# EAGLE board USBHubAndSensorsNEWVIAS (EAGLE 6.0), part 1 of 2
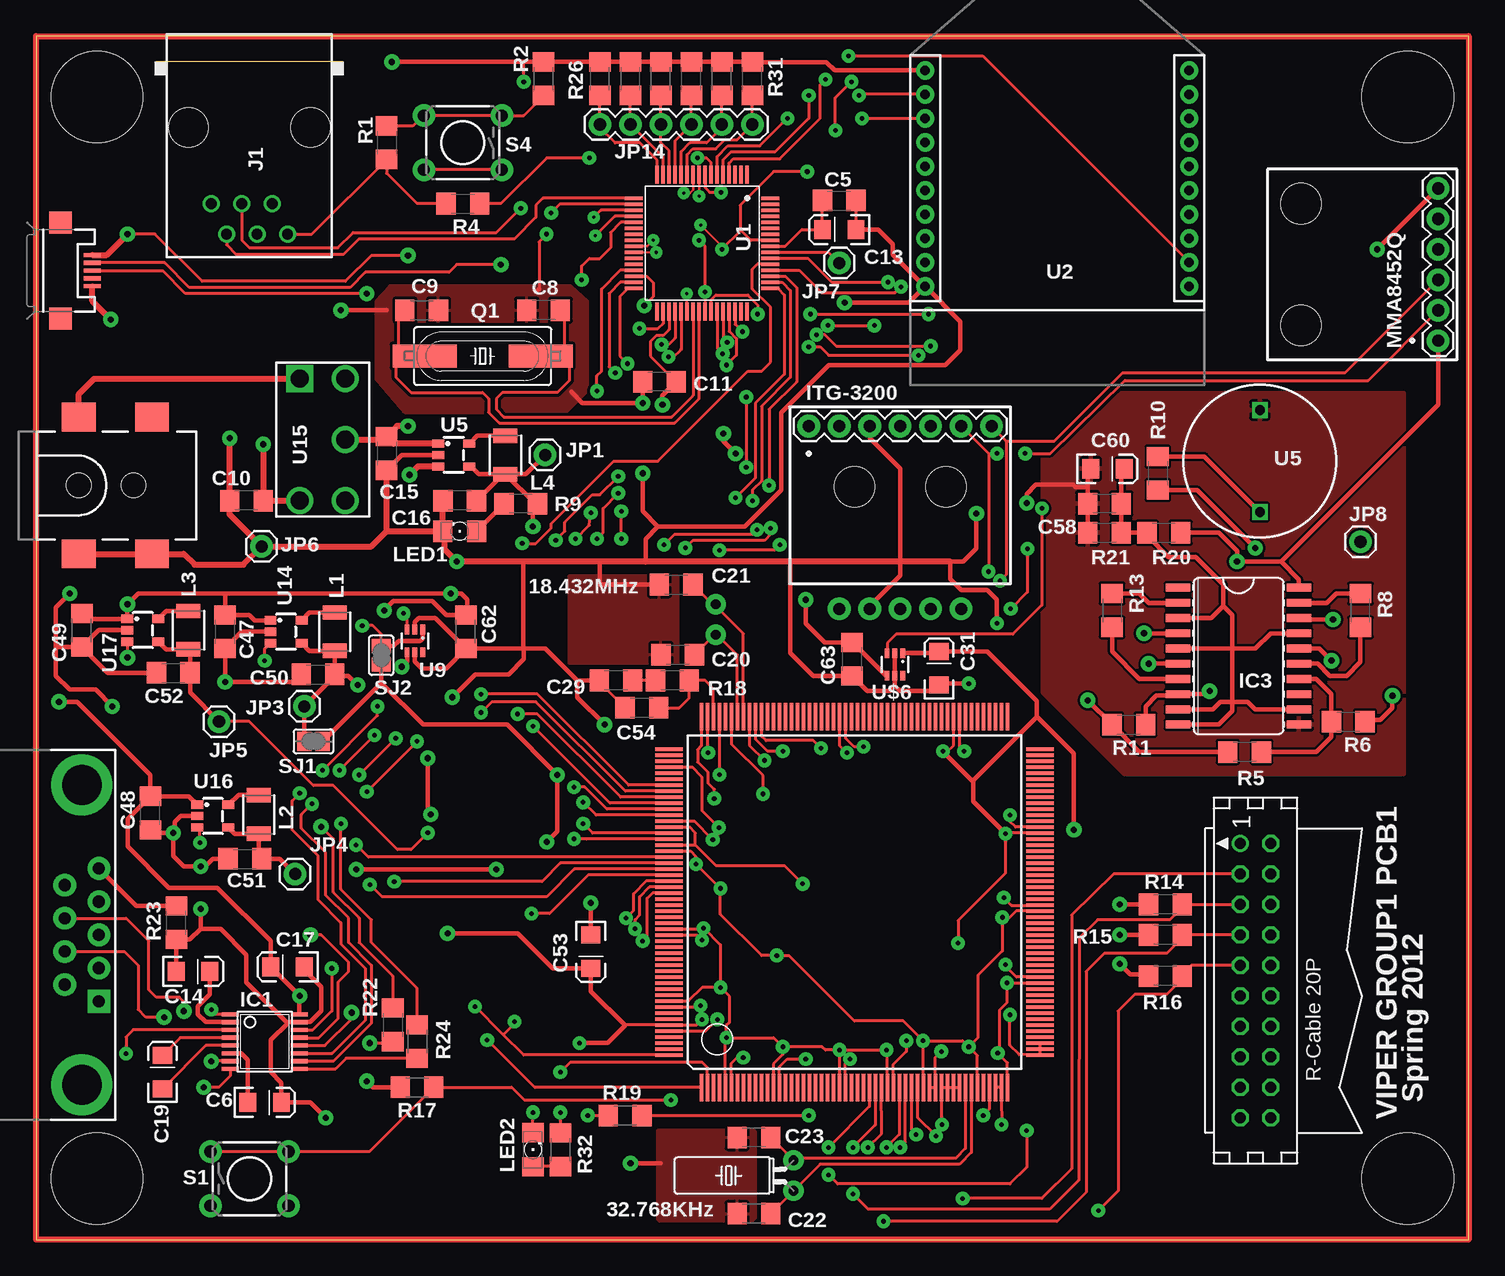
[diagram p0: board, top side]
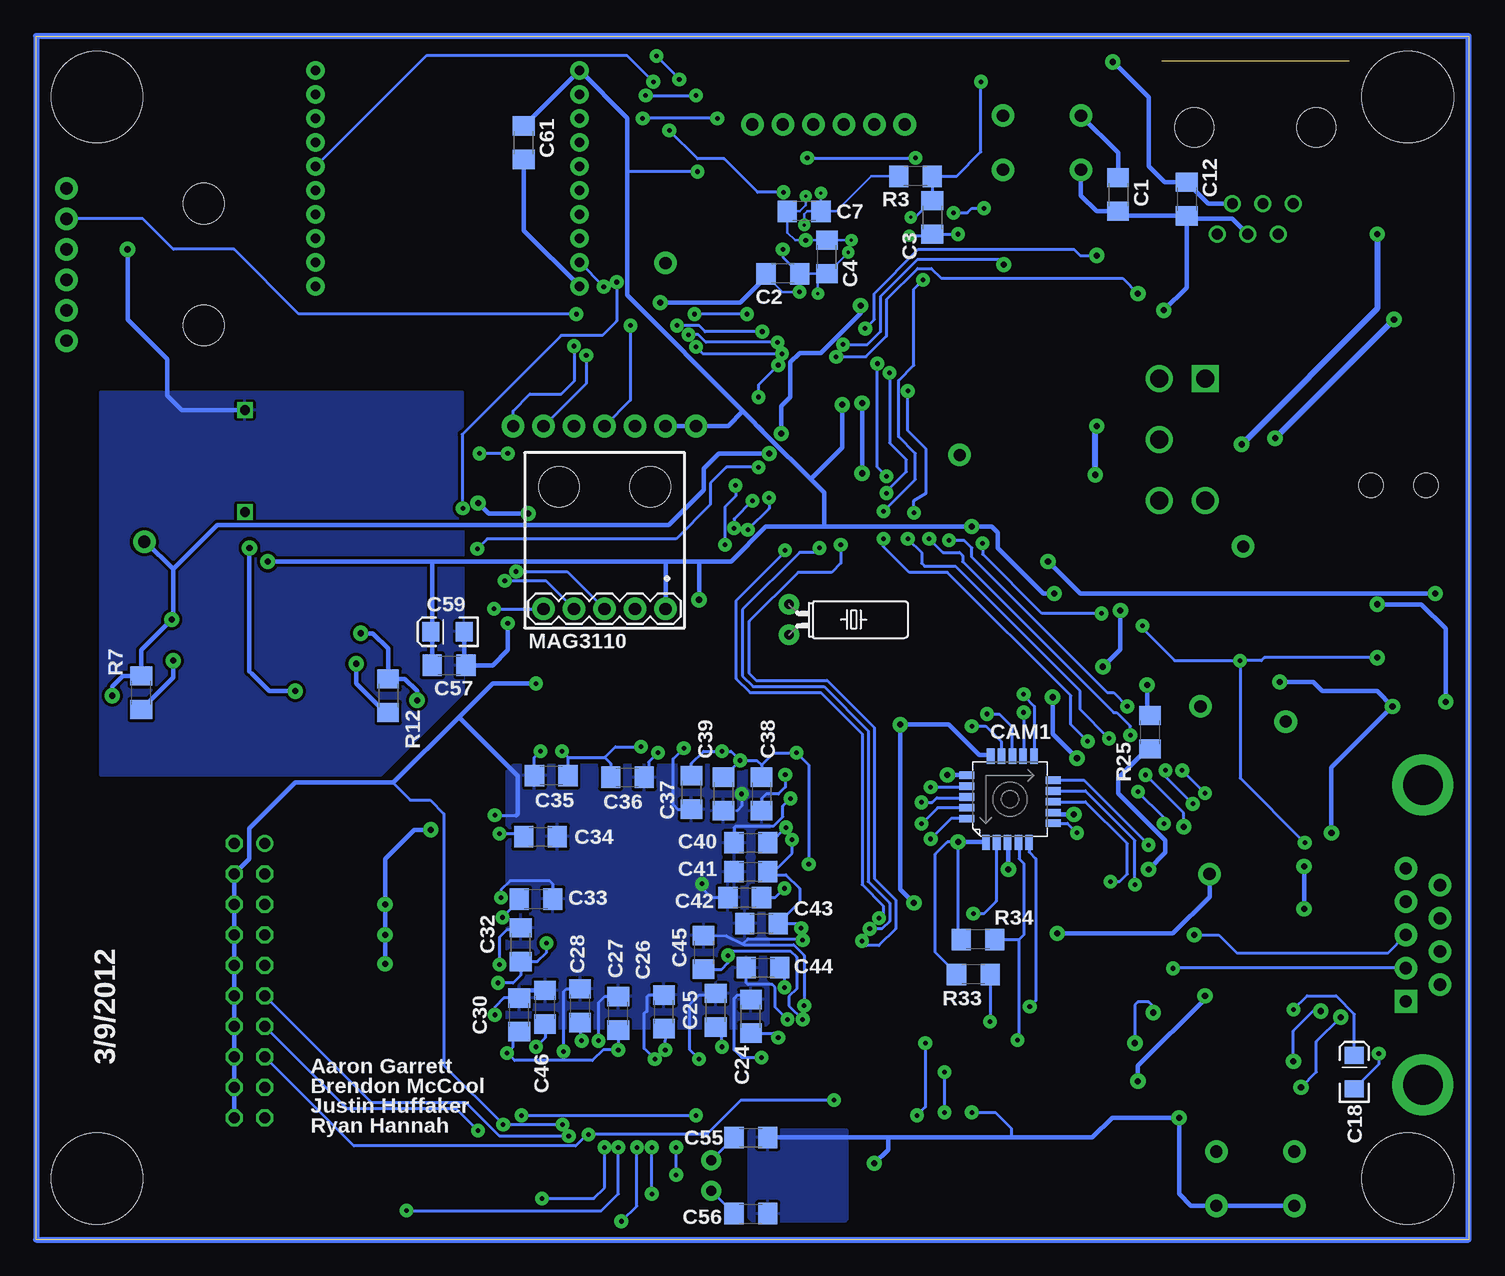
[diagram p1: board, bottom side, seen from below]

Size 119.38 x 100.33 mm. Coordinates in mm from the lower left corner, seen from the top.
Outline: 0,0 119.38,0 119.38,100.33 0,100.33 0,0
Copper layers (1*16): Top 0.035mm / dielectric 1.5mm / Bottom 0.035mm
Design rules: minimum track width 8mil, minimum drill 10mil, track to track 8mil, track to pad 8mil, pad to pad 6mil, via to via 8mil, smd to smd 8mil, copper to edge 40mil, drill to drill 15mil, minimum pad ring 10mil, minimum via ring 15mil, stop-mask expansion 4mil, vias tented up to drill 0mil, thermal gap 10mil
Holes 7.62 mm at 5.08,95.25 5.08,5.08 114.3,95.25 114.3,5.08
Holes 3.37 mm at 105.41,86.36 105.41,76.2 68.2,62.74 75.82,62.74

## Footprints (pad centres in the part's own frame; a part is rotated, then mirrored left to right if it is on the bottom)
TC38H = drill 0.813 pad 1.676: 1 -1.27,0; 2 1.27,0
1206 = smd 1.6 x 1.8: 1 -1.4,0; 2 1.4,0
EIA3216 = smd 1.4 x 1.6: A 1.4,0; C -1.4,0
TCM8230MD = smd 0.635 x 1.27: 1 2,3.6; 2 1.1,3.6; 3 0.2,3.6; 4 -0.7,3.6; 5 -1.6,3.6; 11 -2,-3.6; 12 -1.1,-3.6; 13 -0.2,-3.6; 14 0.7,-3.6; 15 1.6,-3.6 | smd 1.27 x 0.635: 6 -3.6,2; 7 -3.6,1.1; 8 -3.6,0.2; 9 -3.6,-0.7; 10 -3.6,-1.6; 16 3.6,-2; 17 3.6,-1.1; 18 3.6,-0.2; 19 3.6,0.7; 20 3.6,1.6
CON20 = drill 0.914: 1 -11.43,-1.27 | drill 0.914 octagon: 2 -11.43,1.27; 3 -8.89,-1.27; 4 -8.89,1.27; 5 -6.35,-1.27; 6 -6.35,1.27; 7 -3.81,-1.27; 8 -3.81,1.27; 9 -1.27,-1.27; 10 -1.27,1.27; 11 1.27,-1.27; 12 1.27,1.27; 13 3.81,-1.27; 14 3.81,1.27; 15 6.35,-1.27; 16 6.35,1.27; 17 8.89,-1.27; 18 8.89,1.27; 19 11.43,-1.27; 20 11.43,1.27
TSSOP16 = smd 0.35 x 1.4: 1 -2.275,-2.875; 2 -1.625,-2.875; 3 -0.975,-2.875; 4 -0.325,-2.875; 5 0.325,-2.875; 6 0.975,-2.875; 7 1.625,-2.875; 8 2.275,-2.875; 9 2.275,2.875; 10 1.625,2.875; 11 0.975,2.875; 12 0.325,2.875; 13 -0.325,2.875; 14 -0.975,2.875; 15 -1.625,2.875; 16 -2.275,2.875
SO20L = smd 0.66 x 2.032: 1 -5.715,-5.029; 2 -4.445,-5.029; 3 -3.175,-5.029; 4 -1.905,-5.029; 5 -0.635,-5.029; 6 0.635,-5.029; 7 1.905,-5.029; 8 3.175,-5.029; 9 4.445,-5.029; 10 5.715,-5.029; 11 5.715,5.029; 12 4.445,5.029; 13 3.175,5.029; 14 1.905,5.029; 15 0.635,5.029; 16 -0.635,5.029; 17 -1.905,5.029; 18 -3.175,5.029; 19 -4.445,5.029; 20 -5.715,5.029
RJ11-NO_SHIELD = drill 0.9 pad 1.4: 1 -3.175,8.89; 2 -1.905,6.35; 3 -0.635,8.89; 4 0.635,6.35; 5 1.905,8.89; 6 3.175,6.35 | hole 3.251: -5.08,0; 5.08,0
POWER_JACK_SMD = smd 2.8 x 2.4: GND 0,-5.7; P$4 6.1,-5.7; VIN0 0,5.7; VIN1 6.1,5.7 | hole 2.032: 0,0; 4.572,0
1X01 = drill 1.016 pad 1.88: 1 0,0
1X07 = drill 1.016 pad 1.88: 1 0,0; 2 2.54,0; 3 5.08,0; 4 7.62,0; 5 10.16,0; 6 12.7,0; 7 15.24,0
1X06 = drill 1.016 pad 1.88: 1 0,0; 2 2.54,0; 3 5.08,0; 4 7.62,0; 5 10.16,0; 6 12.7,0
1X05 = drill 1.016 pad 1.88: 1 0,0; 2 2.54,0; 3 5.08,0; 4 7.62,0; 5 10.16,0
1210 = smd 1.2 x 2: 1 -1.6,0; 2 1.6,0
FKIT-LED-1206 = smd 1.6 x 1.803: A -1.422,0; C 1.422,0
HC49UP = smd 5.334 x 1.93: 1 -4.826,0; 2 4.826,0
TACTILE-PTH = drill 1.016 pad 1.88: 1 -3.251,2.261; 2 3.251,2.261; 3 -3.251,-2.261; 4 3.251,-2.261
SJ = smd 1.168 x 1.6: 1 -0.762,0; 2 0.762,0
64-TQFP = smd 1.5 x 0.3: P$1 -5.7,3.75; P$2 -5.7,3.25; P$3 -5.7,2.75; P$4 -5.7,2.25; P$5 -5.7,1.75; P$6 -5.7,1.25; P$7 -5.7,0.75; P$8 -5.7,0.25; P$9 -5.7,-0.25; P$10 -5.7,-0.75; P$11 -5.7,-1.25; P$12 -5.7,-1.75; P$13 -5.7,-2.25; P$14 -5.7,-2.75; P$15 -5.7,-3.25; P$16 -5.7,-3.75; P$33 5.7,-3.75; P$34 5.7,-3.25; P$35 5.7,-2.75; P$36 5.7,-2.25; P$37 5.7,-1.75; P$38 5.7,-1.25; P$39 5.7,-0.75; P$40 5.7,-0.25; P$41 5.7,0.25; P$42 5.7,0.75; P$43 5.7,1.25; P$44 5.7,1.75; P$45 5.7,2.25; P$46 5.7,2.75; P$47 5.7,3.25; P$48 5.7,3.75 | smd 0.3 x 1.5: P$17 -3.75,-5.7; P$18 -3.25,-5.7; P$19 -2.75,-5.7; P$20 -2.25,-5.7; P$21 -1.75,-5.7; P$22 -1.25,-5.7; P$23 -0.75,-5.7; P$24 -0.25,-5.7; P$25 0.25,-5.7; P$26 0.75,-5.7; P$27 1.25,-5.7; P$28 1.75,-5.7; P$29 2.25,-5.7; P$30 2.75,-5.7; P$31 3.25,-5.7; P$32 3.75,-5.7; P$49 3.75,5.7; P$50 3.25,5.7; P$51 2.75,5.7; P$52 2.25,5.7; P$53 1.75,5.7; P$54 1.25,5.7; P$55 0.75,5.7; P$56 0.25,5.7; P$57 -0.25,5.7; P$58 -0.75,5.7; P$59 -1.25,5.7; P$60 -1.75,5.7; P$61 -2.25,5.7; P$62 -2.75,5.7; P$63 -3.25,5.7; P$64 -3.75,5.7
XBEE-SILK = drill 0.8 pad 1.524: 1 -11,20; 2 -11,18; 3 -11,16; 4 -11,14; 5 -11,12; 6 -11,10; 7 -11,8; 8 -11,6; 9 -11,4; 10 -11,2; 11 11,2; 12 11,4; 13 11,6; 14 11,8; 15 11,10; 16 11,12; 17 11,14; 18 11,16; 19 11,18; 20 11,20
40TR = drill 0.8 square: P$1 0,4.25; P$2 0,-4.25
SOT23-5 = smd 0.686 x 0.991: P$1 -0.953,-1.295; P$2 0,-1.295; P$3 0.953,-1.295; P$4 0.953,1.295; P$5 -0.953,1.295
SC-70-6 = smd 0.4 x 0.8: P$1 -0.65,-0.95; P$2 0,-0.95; P$3 0.65,-0.95; P$4 0.65,0.95; P$5 0,0.95; P$6 -0.65,0.95
PQFP208 = smd 0.3 x 2.286: 1 -12.75,-15.458; 2 -12.25,-15.458; 3 -11.75,-15.458; 4 -11.25,-15.458; 5 -10.75,-15.458; 6 -10.25,-15.458; 7 -9.75,-15.458; 8 -9.25,-15.458; 9 -8.75,-15.458; 10 -8.25,-15.458; 11 -7.75,-15.458; 12 -7.25,-15.458; 13 -6.75,-15.458; 14 -6.25,-15.458; 15 -5.75,-15.458; 16 -5.25,-15.458; 17 -4.75,-15.458; 18 -4.25,-15.458; 19 -3.75,-15.458; 20 -3.25,-15.458; 21 -2.75,-15.458; 22 -2.25,-15.458; 23 -1.75,-15.458; 24 -1.25,-15.458; 25 -0.75,-15.458; 26 -0.25,-15.458; 27 0.25,-15.458; 28 0.75,-15.458; 29 1.25,-15.458; 30 1.75,-15.458; 31 2.25,-15.458; 32 2.75,-15.458; 33 3.25,-15.458; 34 3.75,-15.458; 35 4.25,-15.458; 36 4.75,-15.458; 37 5.25,-15.458; 38 5.75,-15.458; 39 6.25,-15.458; 40 6.75,-15.458; 41 7.25,-15.458; 42 7.75,-15.458; 43 8.25,-15.458; 44 8.75,-15.458; 45 9.25,-15.458; 46 9.75,-15.458; 47 10.25,-15.458; 48 10.75,-15.458; 49 11.25,-15.458; 50 11.75,-15.458; 51 12.25,-15.458; 52 12.75,-15.458; 105 12.75,15.458; 106 12.25,15.458; 107 11.75,15.458; 108 11.25,15.458; 109 10.75,15.458; 110 10.25,15.458; 111 9.75,15.458; 112 9.25,15.458; 113 8.75,15.458; 114 8.25,15.458; 115 7.75,15.458; 116 7.25,15.458; 117 6.75,15.458; 118 6.25,15.458; 119 5.75,15.458; 120 5.25,15.458; 121 4.75,15.458; 122 4.25,15.458; 123 3.75,15.458; 124 3.25,15.458; 125 2.75,15.458; 126 2.25,15.458; 127 1.75,15.458; 128 1.25,15.458; 129 0.75,15.458; 130 0.25,15.458; 131 -0.25,15.458; 132 -0.75,15.458; 133 -1.25,15.458; 134 -1.75,15.458; 135 -2.25,15.458; 136 -2.75,15.458; 137 -3.25,15.458; 138 -3.75,15.458; 139 -4.25,15.458; 140 -4.75,15.458; 141 -5.25,15.458; 142 -5.75,15.458; 143 -6.25,15.458; 144 -6.75,15.458; 145 -7.25,15.458; 146 -7.75,15.458; 147 -8.25,15.458; 148 -8.75,15.458; 149 -9.25,15.458; 150 -9.75,15.458; 151 -10.25,15.458; 152 -10.75,15.458; 153 -11.25,15.458; 154 -11.75,15.458; 155 -12.25,15.458; 156 -12.75,15.458 | smd 2.286 x 0.3: 53 15.458,-12.75; 54 15.458,-12.25; 55 15.458,-11.75; 56 15.458,-11.25; 57 15.458,-10.75; 58 15.458,-10.25; 59 15.458,-9.75; 60 15.458,-9.25; 61 15.458,-8.75; 62 15.458,-8.25; 63 15.458,-7.75; 64 15.458,-7.25; 65 15.458,-6.75; 66 15.458,-6.25; 67 15.458,-5.75; 68 15.458,-5.25; 69 15.458,-4.75; 70 15.458,-4.25; 71 15.458,-3.75; 72 15.458,-3.25; 73 15.458,-2.75; 74 15.458,-2.25; 75 15.458,-1.75; 76 15.458,-1.25; 77 15.458,-0.75; 78 15.458,-0.25; 79 15.458,0.25; 80 15.458,0.75; 81 15.458,1.25; 82 15.458,1.75; 83 15.458,2.25; 84 15.458,2.75; 85 15.458,3.25; 86 15.458,3.75; 87 15.458,4.25; 88 15.458,4.75; 89 15.458,5.25; 90 15.458,5.75; 91 15.458,6.25; 92 15.458,6.75; 93 15.458,7.25; 94 15.458,7.75; 95 15.458,8.25; 96 15.458,8.75; 97 15.458,9.25; 98 15.458,9.75; 99 15.458,10.25; 100 15.458,10.75; 101 15.458,11.25; 102 15.458,11.75; 103 15.458,12.25; 104 15.458,12.75; 157 -15.458,12.75; 158 -15.458,12.25; 159 -15.458,11.75; 160 -15.458,11.25; 161 -15.458,10.75; 162 -15.458,10.25; 163 -15.458,9.75; 164 -15.458,9.25; 165 -15.458,8.75; 166 -15.458,8.25; 167 -15.458,7.75; 168 -15.458,7.25; 169 -15.458,6.75; 170 -15.458,6.25; 171 -15.458,5.75; 172 -15.458,5.25; 173 -15.458,4.75; 174 -15.458,4.25; 175 -15.458,3.75; 176 -15.458,3.25; 177 -15.458,2.75; 178 -15.458,2.25; 179 -15.458,1.75; 180 -15.458,1.25; 181 -15.458,0.75; 182 -15.458,0.25; 183 -15.458,-0.25; 184 -15.458,-0.75; 185 -15.458,-1.25; 186 -15.458,-1.75; 187 -15.458,-2.25; 188 -15.458,-2.75; 189 -15.458,-3.25; 190 -15.458,-3.75; 191 -15.458,-4.25; 192 -15.458,-4.75; 193 -15.458,-5.25; 194 -15.458,-5.75; 195 -15.458,-6.25; 196 -15.458,-6.75; 197 -15.458,-7.25; 198 -15.458,-7.75; 199 -15.458,-8.25; 200 -15.458,-8.75; 201 -15.458,-9.25; 202 -15.458,-9.75; 203 -15.458,-10.25; 204 -15.458,-10.75; 205 -15.458,-11.25; 206 -15.458,-11.75; 207 -15.458,-12.25; 208 -15.458,-12.75
G-197 = drill 1.5 square: P$1 -5.08,-1.905 | drill 1.5: P$2 5.08,-1.905; P$3 5.08,1.905; P$4 -5.08,1.905; P$5 0,1.905
DB9 = drill 1.016 pad 1.88 square: 1 -5.54,-1.42 | drill 1.016 pad 1.88: 2 -2.77,-1.42; 3 0,-1.42; 4 2.77,-1.42; 5 5.54,-1.42; 6 -4.15,1.42; 7 -1.38,1.42; 8 1.38,1.42; 9 4.15,1.42 | drill 3.302 pad 5.08: G1 -12.5,0; G2 12.5,0
USB-MICROB = smd 0.35 x 1.4: D+ 0,2.65; D- -0.65,2.65; GND 1.3,2.65; ID 0.65,2.65; VBUS -1.3,2.65 | smd 1.8 x 1.9: MT1 -4,0; MT2 4,0

## Placement (x,y rotation side)
300-8444-ND  18.432MHz  [TC38H]  56.64,51.69 270 bottom
535-9034-ND  32.768kHz  [TC38H]  63.12,5.33 90 top
C1  0.1uf  [1206]  29.21,87.12 270 bottom
C2  0.1uf  [1206]  57.15,80.52 180 bottom
C3  0.1uf  [1206]  44.7,85.22 270 bottom
C4  0.1uf  [1206]  53.47,81.92 90 bottom
C5  0.1uf  [1206]  66.93,86.61 0 top
C6  0.1uf  [EIA3216]  19.05,11.43 0 top
C7  0.1uf  [1206]  55.37,85.72 180 bottom
C8  22pf  [1206]  42.29,77.47 180 top
C9  22pf  [1206]  32.13,77.47 0 top
C10  1uf  [1206]  17.53,61.59 180 top
C11  0.1uf  [1206]  51.94,71.5 180 top
C12  0.1uf  [1206]  23.5,86.74 270 bottom
C13  10uf  [EIA3216]  66.93,84.2 180 top
C14  0.1uf  [EIA3216]  13.08,22.35 0 top
C15  4.7uF  [1206]  29.21,65.53 270 top
C16  10uf  [1206]  35.31,61.59 180 top
C17  0.1uf  [EIA3216]  20.95,22.73 180 top
C18  0.1uf  [EIA3216]  9.53,13.97 90 bottom
C19  0.1uf  [EIA3216]  10.54,13.97 90 top
C20  10pF  [1206]  53.47,48.77 0 top
C21  10pF  [1206]  53.34,54.61 0 top
C22  10pF  [1206]  59.82,2.16 180 top
C23  10pF  [1206]  59.82,8.51 180 top
C24  100nF  [1206]  59.82,18.61 90 bottom
C25  100nF  [1206]  62.74,19.11 90 bottom
C26  100nF  [1206]  67.06,18.99 90 bottom
C27  100nF  [1206]  70.87,18.86 90 bottom
C28  100nF  [1206]  74.04,19.49 90 bottom
C29  10nf  [1206]  48.32,46.61 180 top
C30  100nF  [1206]  79.12,18.73 90 bottom
C31  10uf  [EIA3216]  75.25,47.62 90 top
C32  100nF  [1206]  78.99,24.57 90 bottom
C33  100nF  [1206]  77.72,28.38 0 bottom
C34  100nF  [1206]  77.34,33.59 0 bottom
C35  100nF  [1206]  76.45,38.67 180 bottom
C36  100nF  [1206]  70.1,38.54 0 bottom
C37  100nF  [1206]  64.77,37.27 270 bottom
C38  100nF  [1206]  58.93,37.15 270 bottom
C39  100nF  [1206]  62.1,37.15 270 bottom
C40  100nF  [1206]  59.82,33.08 0 bottom
C41  100nF  [1206]  59.82,30.67 0 bottom
C42  100nF  [1206]  60.33,28.51 0 bottom
C43  100nF  [1206]  58.93,26.35 0 bottom
C44  100nF  [1206]  58.8,22.67 0 bottom
C45  100nF  [1206]  63.75,23.94 270 bottom
C46  100nF  [1206]  76.96,19.37 90 bottom
C47  4.7uF  [1206]  15.75,50.67 90 top
C48  4.7uF  [1206]  9.53,35.56 90 top
C49  4.7uF  [1206]  3.81,50.8 90 top
C50  10uF  [1206]  23.5,47.12 0 top
C51  10uf  [1206]  17.4,31.75 0 top
C52  10uf  [1206]  11.43,47.24 0 top
C53  10uf  [EIA3216]  46.23,24 270 top
C54  1nf  [1206]  50.48,44.32 180 top
C55  7pF  [1206]  59.82,8.51 0 bottom
C56  7pF  [1206]  59.82,2.16 0 bottom
C57  0.1uf  [1206]  84.96,47.88 0 bottom
C58  0.1uf  [1206]  89.03,61.34 180 top
C59  4.7uf  [EIA3216]  85.09,50.67 180 bottom
C60  4.7uf  [EIA3216]  89.28,64.26 0 top
C61  0.1uf  [1206]  78.74,91.44 90 bottom
C62  0.1uf  [1206]  35.81,50.67 90 top
C63  0.1uf  [1206]  68.01,48.39 90 top
CAM1  TCM8230MD  [TCM8230MD]  38.23,36.7 180 bottom
CON1  [CON20]  101.6,21.59 270 top
IC1  MAX3232CUE  [TSSOP16]  19.05,16.51 270 top
IC3  MAX275ACPBCWP  [SO20L]  100.2,48.64 270 top
J1  RJ11-6L-B  [RJ11-NO_SHIELD]  17.78,92.71 180 top
J2  POWER_JACKSMD  [POWER_JACK_SMD]  3.56,62.87 0 top
JP1  M01PTH  [1X01]  42.42,65.41 0 top
JP3  M01PTH  [1X01]  22.35,44.45 0 top
JP4  M01PTH  [1X01]  21.59,30.48 0 top
JP4_ITG-3200  [1X07]  64.39,67.82 0 top
JP5  M01PTH  [1X01]  15.24,43.18 0 top
JP5_MMA8452Q  [1X06]  116.84,74.93 90 top
JP6  M01PTH  [1X01]  18.8,57.78 0 top
JP6_MAG3110  [1X05]  66.93,52.58 180 bottom
JP7  M01PTH  [1X01]  66.93,81.41 180 top
JP8  M01PTH  [1X01]  110.36,58.17 0 top
JP14  [1X06]  46.99,92.96 0 top
L1  2.2uH  [1210]  24.89,50.67 270 top
L2  2.2uH  [1210]  18.54,35.43 270 top
L3  2.2uH  [1210]  12.7,50.8 270 top
L4  2.2uH  [1210]  39.12,65.41 270 top
LED1  [FKIT-LED-1206]  35.31,59.05 180 top
LED2  [FKIT-LED-1206]  41.4,7.49 90 top
Q1  8MHz  [HC49UP]  37.21,73.66 0 top
R1  370  [1206]  29.21,91.44 270 top
R2  10k  [1206]  42.29,96.77 90 top
R3  10  [1206]  46.1,88.65 180 bottom
R4  100  [1206]  35.56,86.36 0 top
R5  50k  [1206]  100.71,40.64 180 top
R6  100k  [1206]  109.35,43.18 0 top
R7  45k  [1206]  110.62,45.59 90 bottom
R8  50k  [1206]  110.36,52.45 90 top
R9  65  [1206]  40.39,61.34 180 top
R10  50k  [1206]  93.47,63.88 270 top
R11  100k  [1206]  91.06,42.93 0 top
R12  45k  [1206]  90.04,45.34 270 bottom
R13  50k  [1206]  89.66,52.45 270 top
R14  100K  [1206]  94.11,27.94 180 top
R15  100K  [1206]  94.11,25.4 180 top
R16  100K  [1206]  94.11,21.97 180 top
R17  1K  [1206]  31.75,12.7 0 top
R18  100K  [1206]  53.02,46.61 180 top
R19  100k  [1206]  49.09,10.35 0 top
R20  4.7k  [1206]  93.98,58.93 0 top
R21  4.7k  [1206]  89.03,58.93 0 top
R22  470  [1206]  29.72,17.91 270 top
R23  10  [1206]  11.68,26.42 90 top
R24  470  [1206]  31.75,16.51 270 top
R25  100K  [1206]  26.54,42.29 90 bottom
R26  10k  [1206]  46.99,96.77 90 top
R27  10k  [1206]  49.53,96.77 90 top
R28  10k  [1206]  52.07,96.77 90 top
R29  10k  [1206]  54.61,96.77 90 top
R30  10k  [1206]  57.15,96.77 90 top
R31  10k  [1206]  59.69,96.77 90 top
R32  1k  [1206]  43.69,7.49 270 top
R33  10k  [1206]  41.27,22.1 180 bottom
R34  10k  [1206]  40.89,25.02 180 bottom
S1  [TACTILE-PTH]  17.78,5.08 0 top
S4  [TACTILE-PTH]  35.56,91.44 180 top
SJ1  [SJ]  23.11,41.53 180 top
SJ2  [SJ]  28.77,48.7 90 top
U$1  PIC32MX534F06HTQFP  [64-TQFP]  55.5,83.06 270 top
U$2  XBEE-1B2  [XBEE-SILK]  85.09,77.47 0 top
U$5  40TR-12B  [40TR]  101.98,64.9 0 top
U$5_LM3671MF-3.3  LM36715  [SOT23-5]  34.8,65.41 270 top
U$6  MIC94061YC6  [SC-70-6]  71.56,47.94 180 top
U$7  AT91SAM9XE256  [PQFP208]  68.2,28.13 0 top
U$9  MIC94061YC6  [SC-70-6]  31.56,49.91 180 top
U$14_LM3671MF-2.8  LM36715  [SOT23-5]  20.83,50.67 270 top
U$15  G-107PLUG-IN  [G-197]  23.88,66.67 270 top
U$16_LM3671MF-1.8  LM36715  [SOT23-5]  14.73,35.31 270 top
U$17_LM3671-1.5  LM36715  [SOT23-5]  8.89,50.8 270 top
X1  [DB9]  3.81,25.4 90 top
X2  USB-MICROB  [USB-MICROB]  2.03,80.77 270 top

## Library data of the parts
300-8444-ND 535-9034-ND = SparkFun-FreqCtrl
C1-C63 L1-L4 R1-R34 = SparkFun-Passives
CAM1 U$7 = AT91SAM9XE256
CON1 = con-harting; OC_FARNELL: unknown; OC_NEWARK: unknown
IC1 = maxim; MF: MAXIM; MPN: MAX3232CUE+; OC_FARNELL: 1593350; OC_NEWARK: 68K4629
IC3 = maxim
J1 = con-tycoelectronics; MF: TYCO ELECTRONICS; MPN: RJ11-6L-B; OC_FARNELL: unknown; OC_NEWARK: 52K3613
J2 JP1 JP3 JP4 JP4_ITG-3200 JP5 JP5_MMA8452Q JP6 JP6_MAG3110 JP7 JP8 JP14 X1 X2 = SparkFun-Connectors
LED1 LED2 = SparkFun-LED
Q1 = crystal; OC_FARNELL: unknown; OC_NEWARK: unknown
S1 S4 = SparkFun-Electromechanical
SJ1 SJ2 = jumper
U$1 U$5 U$5_LM3671MF-3.3 U$6 U$9 U$14_LM3671MF-2.8 U$15 U$16_LM3671MF-1.8 U$17_LM3671-1.5 = hw1
U$2 = SparkFun-RF

## Nets
1.8V: C28.1 C33.1 C37.1 C38.1 C39.1 C42.2 C45.2 C46.1 C51.2 C53.A JP4.1 L2.2 R19.1 U$7.38 U$7.47 U$7.77 U$7.147 U$7.148 U$7.155 U$7.174 U$7.203 U$16_LM3671MF-1.8.P$4
2.8V: C50.2 JP3.1 L1.2 R25.2 SJ1.2 U$14_LM3671MF-2.8.P$4
3.3V: C2.1 C3.1 C4.1 C7.1 C11.1 C12.1 C16.1 C17.A C47.2 C48.2 C49.2 C57.1 C59.A C61.2 C62.2 C63.2 IC1.16 IC3.20 J1.2 JP1.1 JP4_ITG-3200.1 JP4_ITG-3200.2 JP5_MMA8452Q.1 JP6_MAG3110.1 L4.2 R2.2 R3.1 R3.2 R9.1 R17.1 R20.2 R26.2 R27.2 R28.2 R29.2 R30.2 R31.2 U$1.P$10 U$1.P$19 U$1.P$26 U$1.P$35 U$1.P$38 U$1.P$57 U$2.1 U$5_LM3671MF-3.3.P$4 U$6.P$4 U$9.P$4 U$14_LM3671MF-2.8.P$1 U$16_LM3671MF-1.8.P$1 U$17_LM3671-1.5.P$1
5V: C15.1 U$5_LM3671MF-3.3.P$1 U$5_LM3671MF-3.3.P$3 U$15.P$5
AN15: IC3.18 JP8.1 R6.2 R7.2 U$1.P$30
CAM3.3V: SJ2.2 U$9.P$1 U$14_LM3671MF-2.8.P$3 U$16_LM3671MF-1.8.P$3 U$17_LM3671-1.5.P$3
CTSDATA: IC1.7 X1.8
GND: C1.2 C2.2 C3.2 C4.2 C5.2 C6.A C7.2 C8.2 C9.2 C10.2 C11.2 C12.2 C13.C C14.C C15.2 C16.2 C17.C C20.1 C21.1 C22.2 C23.2 C24.2 C25.2 C26.2 C27.2 C28.2 C29.2 C30.2 C31.C C32.2 C33.2 C34.2 C35.2 C36.2 C37.2 C38.2 C39.2 C40.1 C41.1 C42.1 C43.1 C44.1 C45.1 C46.2 C47.1 C48.1 C49.1 C50.1 C51.1 C52.1 C53.C C54.2 C55.2 C56.2 C57.2 C58.2 C59.C C60.C C61.1 C62.1 C63.1 CAM1.7 CAM1.15 CON1.4 CON1.6 CON1.8 CON1.10 CON1.12 CON1.14 CON1.16 CON1.18 CON1.20 IC1.15 IC3.11 J1.3 J2.GND J2.P$4 JP4_ITG-3200.3 JP5_MMA8452Q.6 JP6.1 JP6_MAG3110.2 LED1.C LED2.C R21.1 R23.1 S1.3 S1.4 S4.1 S4.2 U$1.P$9 U$1.P$20 U$1.P$25 U$1.P$41 U$2.10 U$5.P$1 U$5_LM3671MF-3.3.P$2 U$6.P$2 U$6.P$5 U$7.6 U$7.14 U$7.25 U$7.33 U$7.39 U$7.40 U$7.41 U$7.42 U$7.43 U$7.44 U$7.50 U$7.51 U$7.53 U$7.54 U$7.55 U$7.66 U$7.78 U$7.91 U$7.113 U$7.133 U$7.146 U$7.151 U$7.153 U$7.156 U$7.170 U$7.173 U$7.188 U$7.200 U$7.204 U$9.P$2 U$9.P$5 U$14_LM3671MF-2.8.P$2 U$16_LM3671MF-1.8.P$2 U$17_LM3671-1.5.P$2 X2.GND
INT0: JP4_ITG-3200.4 U$1.P$46
INT1: JP5_MMA8452Q.5 U$1.P$42
INT4: JP6_MAG3110.5 U$1.P$45
N$1: C1.1 R1.1 R2.1 S4.3 S4.4
N$2: C24.1 C25.1 C26.1 C27.1 C30.1 C31.A C32.1 C34.1 C35.1 C36.1 C40.2 C41.2 C43.2 C44.2 R14.2 R15.2 R16.2 U$6.P$1 U$7.5 U$7.13 U$7.24 U$7.32 U$7.52 U$7.65 U$7.90 U$7.114 U$7.132 U$7.160 U$7.169 U$7.187 U$7.199
N$3: J1.4 U$1.P$18
N$4: C9.1 Q1.1 U$1.P$40
N$5: C8.1 Q1.2 U$1.P$39
N$6: R4.2 U$1.P$7
N$7: J1.5 U$1.P$17
N$8: L4.1 U$5_LM3671MF-3.3.P$5
N$9: U$1.P$6 U$2.3
N$10: C18.A IC1.1
N$11: C18.C IC1.3
N$12: C19.A IC1.4
N$13: C5.1 C13.A U$1.P$56
N$14: U$1.P$36 X2.D-
N$15: U$1.P$37 X2.D+
N$16: C19.C IC1.5
N$17: U$1.P$5 U$2.2
N$18: U$1.P$8 U$2.16
N$19: U$1.P$4 U$2.12
N$20: CON1.11 U$7.37
N$21: J1.1 R1.2 R4.1
N$22: CAM1.3 R25.1
N$23: C14.A IC1.2
N$24: C6.C IC1.6
N$25: IC3.14 R5.1 R6.1
N$26: R10.1 U$5.P$2
N$27: IC3.16 R7.1
N$28: LED1.A R9.2
N$29: IC3.15 R8.1
N$30: IC3.19 R8.2
N$31: IC3.2 R13.1
N$32: IC3.7 R13.2
N$33: IC3.6 R12.2
N$34: IC3.8 R10.2 R11.2
N$35: IC3.4 R5.2 R11.1 R12.1
N$36: CAM1.11 U$7.163
N$37: CAM1.12 U$7.164
N$38: CAM1.13 U$7.165
N$39: CAM1.14 U$7.166
N$40: CAM1.17 U$7.167
N$41: CAM1.18 U$7.168
N$42: CAM1.19 U$7.171
N$43: CAM1.20 U$7.172
N$44: CAM1.10 U$7.175
N$45: CAM1.8 U$7.176
N$46: CAM1.9 U$7.177
N$47: CAM1.2 U$7.178
N$48: CAM1.4 R34.1 U$7.1
N$49: CAM1.5 R33.1 U$7.208
N$50: 300-8444-ND.1 C21.2 U$7.149
N$51: 300-8444-ND.2 C20.2 U$7.150
N$52: 535-9034-ND.1 C22.1 C56.1 U$7.46
N$53: 535-9034-ND.2 C23.1 C55.1 U$7.45
N$54: CON1.5 R14.1 U$7.30
N$55: CON1.7 R15.1 U$7.31
N$56: CON1.9 R16.1 U$7.34
N$57: CON1.13 U$7.29
N$58: CON1.3 U$7.35
N$59: CAM1.1 CAM1.16 R33.2 R34.2 SJ1.1 SJ2.1
N$60: L1.1 U$14_LM3671MF-2.8.P$5
N$61: L2.1 U$16_LM3671MF-1.8.P$5
N$62: L3.1 U$17_LM3671-1.5.P$5
N$63: C54.1 R18.1 U$7.154
N$64: C29.1 R18.2
N$65: R19.2 U$7.49
N$66: J2.VIN0 U$15.P$1
N$67: IC1.12 R22.2
N$68: C58.1 C60.A IC3.3 IC3.5 IC3.9 IC3.10 IC3.12 IC3.17 R20.1 R21.2
N$69: R23.2 X1.5
N$70: R32.1 U$7.2
N$71: IC1.9 R24.2
N$72: LED2.A R32.2
N$80: CON1.15 R17.2 S1.1 S1.2 U$7.36
RB0: JP14.1 R26.1 U$1.P$16
RB1: JP14.2 R27.1 U$1.P$15
RB2: JP14.3 R28.1 U$1.P$14
RB3: JP14.4 R29.1 U$1.P$13
RB4: JP14.5 R30.1 U$1.P$12
RB5: JP14.6 R31.1 U$1.P$11
RD4: U$1.P$52 U$2.9
RD5: U$1.P$53 U$9.P$3
RD6: U$1.P$54 U$6.P$3
RD7: JP7.1 U$1.P$55
RTSDATA: IC1.8 X1.7
RXDATA: IC1.13 X1.3
SCL1: JP4_ITG-3200.7 JP5_MMA8452Q.3 JP6_MAG3110.4 U$1.P$44
SDA1: JP4_ITG-3200.6 JP5_MMA8452Q.2 JP6_MAG3110.3 U$1.P$43
SPIO_MISO: U$1.P$51 U$7.179
SPIO_MOSI: U$1.P$50 U$7.180
SPIO_SPCK: U$1.P$49 U$7.181
TXDATA: IC1.14 X1.2
U2CTS_L: R24.1 U$1.P$21
U2RTS_L: IC1.10 U$1.P$29
U2RX: R22.1 U$1.P$31
U2TX: IC1.11 U$1.P$32
VBUS: C10.1 U$1.P$34 U$15.P$2 X2.VBUS
VCC: C52.2 CAM1.6 JP5.1 L3.2 U$17_LM3671-1.5.P$4